# Altium PCB wled-tube.PcbDoc
Units mm, origin at the board's own origin, x right, y up, seen from the top; angles counter-clockwise.
Board outline 23 x 76.5 mm, 4 copper layers (Top Layer, GND, PWR, Bottom Layer), stack 1.582 mm thick; 64 components, 43 nets, 223 pads, 134 vias.
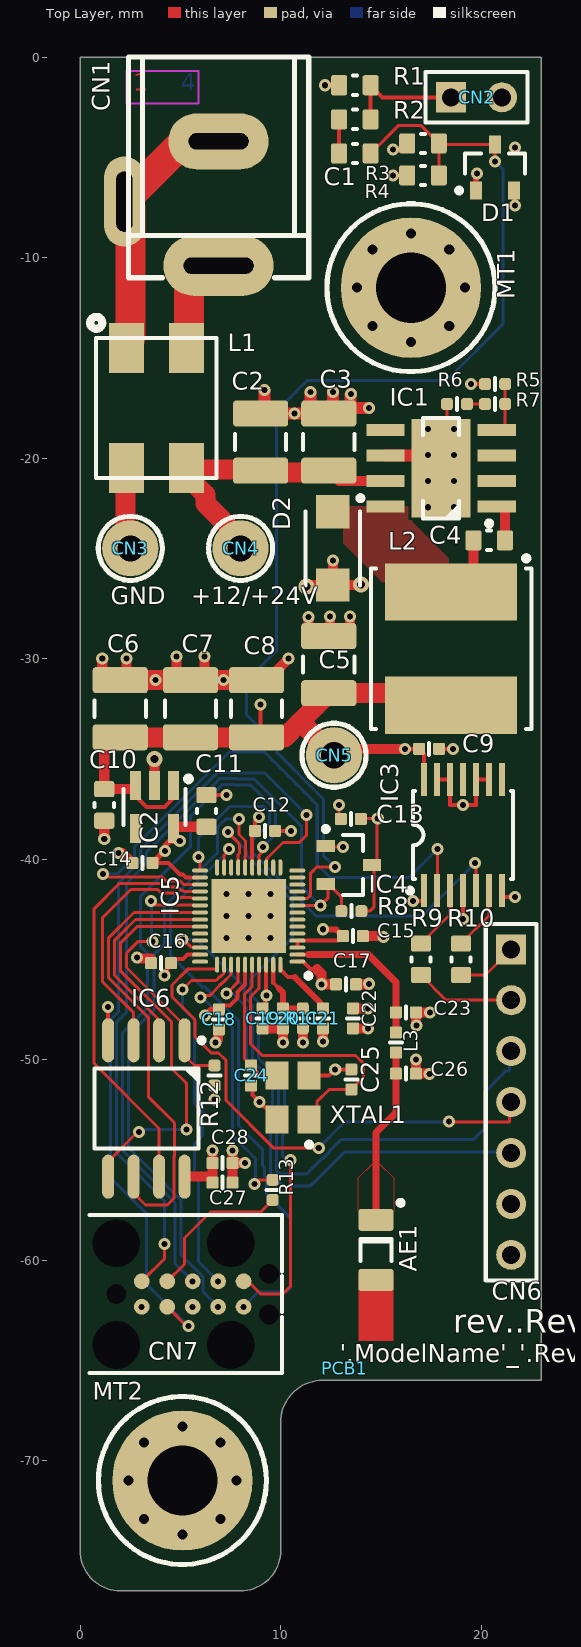
[diagram p0: Top Layer view]
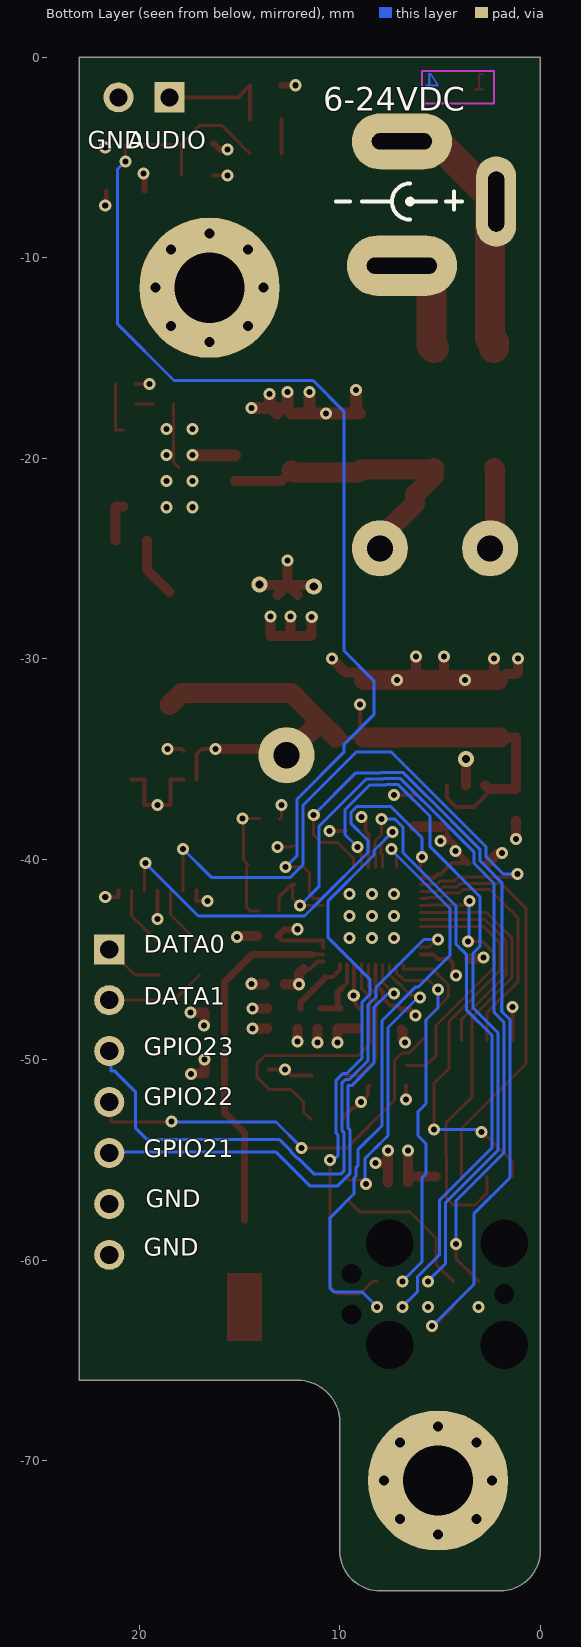
[diagram p1: Bottom Layer view, seen from below]
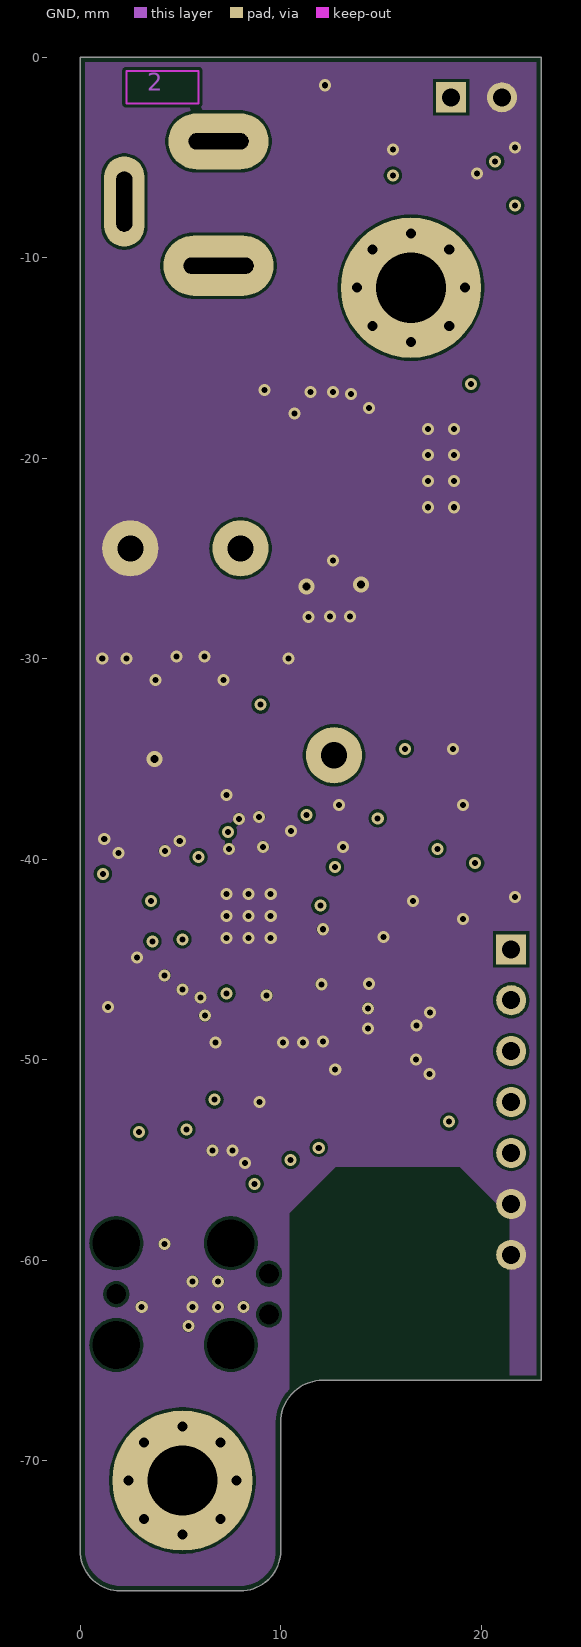
[diagram p2: GND]
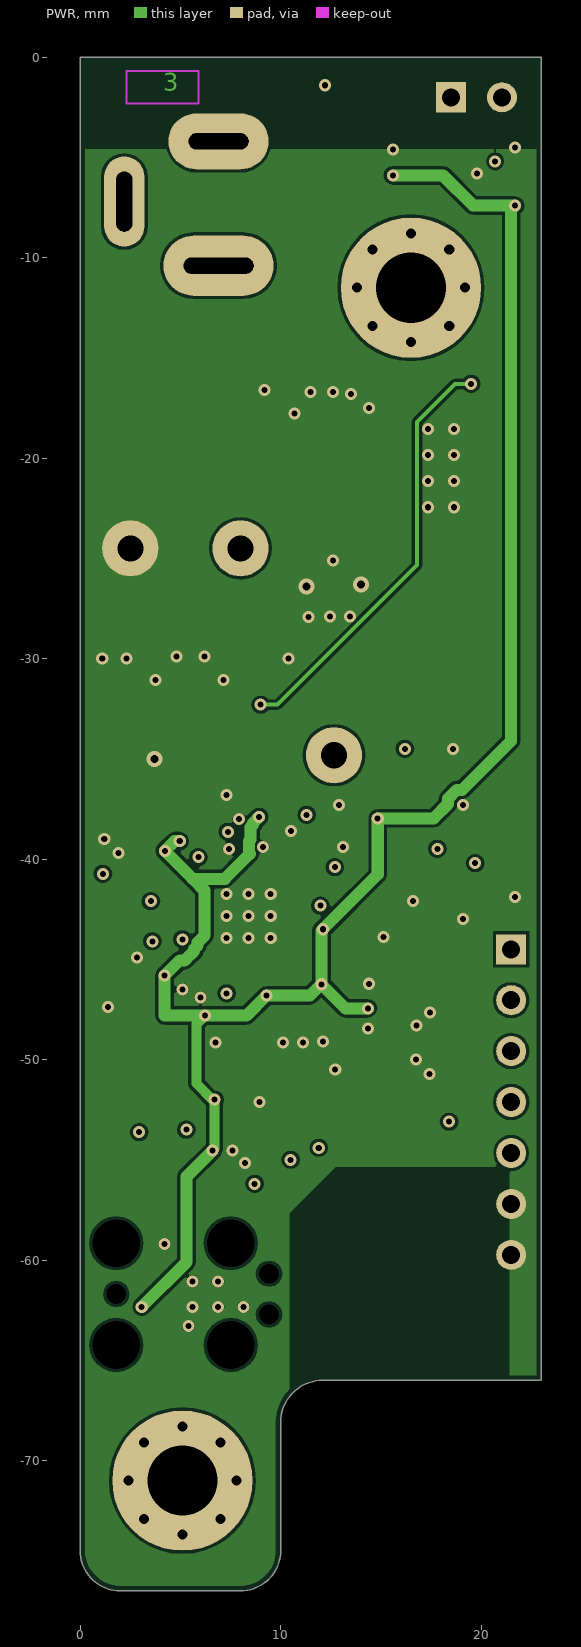
[diagram p3: PWR]
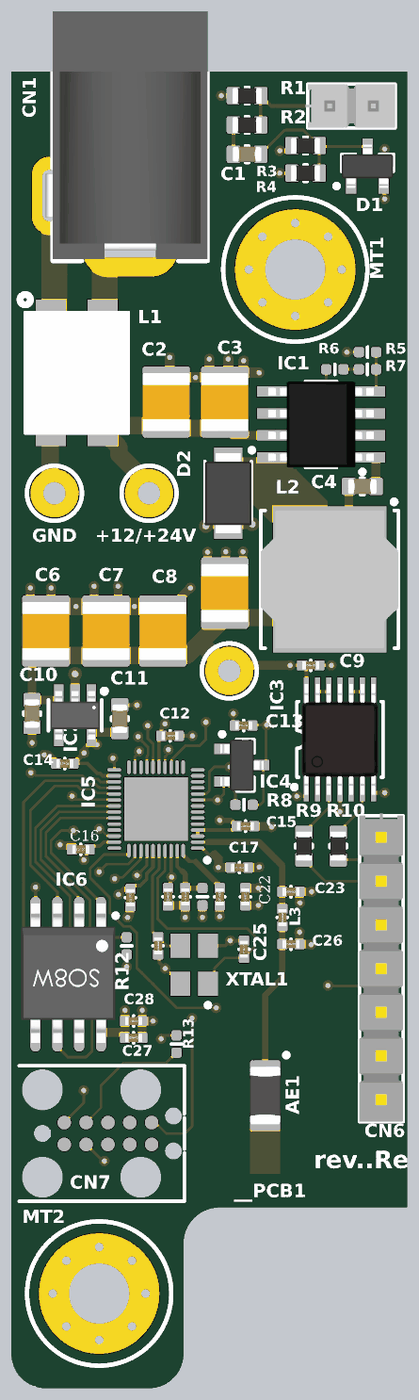
[diagram p4: 3D render of the assembled board from above, using the file's embedded part models]

## Layer stack, top to bottom
Top Solder: solder mask 0.0102, Solder Resist, Dk 3.5
Top Layer: signal copper 0.035
Dielectric1: prepreg 0.2104, 7628HR, Dk 4.6
GND: signal copper 0.0175
Dielectric2: core 1.065, NY3150, Dk 4.8
PWR: signal copper 0.0175
Dielectric3: prepreg 0.2014, 7628HR, Dk 4.6
Bottom Layer: signal copper 0.035
Bottom Solder: solder mask 0.0102, Solder Resist, Dk 3.5

## Board outline
10,-74.5 10,-68.1 cw(c12.1,-68.1) 12.1,-66 23,-66 23,0 0,0 0,-74.5 ccw(c2,-74.5) 2,-76.5 8,-76.5 ccw(c8,-74.5)

## Design rules (kind name [scope] priority, off if disabled: settings)
BoardOutlineClearance [All] p1: gap=0.254 ignorepadtopadclearanceinfootprint=FALSE except(0: Arc-SplitContinuation Track-SplitContinuation SMDPad-SplitContinuation THPad-SplitContinuation Via-SplitContinuation Fill-SplitContinuation Poly-SplitContinuation Region-SplitContinuation Text-SplitContinuation)
Clearance Clearance_50ohm [InNetClass('50ohm') vs InNet('GND')] p1: gap=0.3 ignorepadtopadclearanceinfootprint=TRUE except(0.15: Arc-SMDPad Track-SMDPad SMDPad-SMDPad; 1: Arc-Fill Arc-Poly Arc-Region Track-Fill Track-Poly Track-Region SMDPad-Fill SMDPad-Poly SMDPad-Region THPad-Fill THPad-Poly THPad-Region Via-Fill Via-Poly Via-Region Fill-Fill Fill-Poly Fill-Region Poly-Poly Poly-Region Region-Region)
Clearance [All] p2: gap=0.15 ignorepadtopadclearanceinfootprint=FALSE except(0.254: Arc-THPad Arc-Hole Track-THPad Track-Hole Via-Via; 0.5: THPad-THPad)
ComponentClearance ComponentClearance_SMA_RFIO [InComponent('RFIO')] p1: gap=0.1 collisioncheckmode=3 verticalgap=0.1 showdistances=FALSE
ComponentClearance [All] p2: gap=0.2 collisioncheckmode=3 verticalgap=0.3 showdistances=FALSE
HoleSize [All] p1: absolutevalues=TRUE maxlimit=3.6 minlimit=0.25 maxpercent=80.000 minpercent=20.000
HoleToHoleClearance [All] p1: gap=0.5 allowstackedmicrovias=TRUE
MinimumSolderMaskSliver [All] p1: minsoldermaskwidth=0.04
PlaneClearance [All] p1: clearance=0.2
PlaneConnect [All] p1: planeconnectstyle=Direct reliefexpansion=0.508 reliefentries=4 reliefconductorwidth=0.254 reliefairgap=0.254
PolygonConnect PolygonConnect_all [All] p1: connectstyle=Direct reliefconductorwidth=0.6 reliefentries=4 polygonreliefangle="90 Angle" airgapwidth=0.254
RoutingVias [All] p1: holewidth=0.3 width=0.6 viastyle="Through Hole" minholewidth=0.3 minwidth=0.6 maxholewidth=0.4 maxwidth=0.8
SilkToSilkClearance [All] p1: silktosilkclearance=0.05
SilkToSolderMaskClearance SilkscreenOverComponentPads [IsPad] p1: minsilkscreentomaskgap=0.05 clearancetoexposedcopper=TRUE
SolderMaskExpansion [All] p1: expansion=0.05 istentingtop=FALSE
Width Width_50ohm [InNetClass('50ohm')] p1: maxlimit=0.355 minlimit=0.254 preferedwidth=0.355 toplayer_minwidth=0.355 bottomlayer_minwidth=0.355 impedanceprofiledriven=TRUE minimp=50.000000 maximp=50.000000 favimp=50.000000
Width "Width All" [All] p2: maxlimit=2 minlimit=0.15 preferedwidth=0.2
22 further rules are at their usual default settings.

## Classes and differential pairs
net class QSPI: SD_CLK SD_CMD/C\S\ SD_D0/SDO SD_D1/SDI SD_D2/SHD SD_D3/SWP
net class 50ohm: NetAE1_1 NetC23_2

## Components (designator, comment, footprint, x,y, rotation, side; value= is the part's Value field where it differs from the comment)
AE1 "ANT3216LL00R2400A" 1206-ANT 14.755,-59.494 r270 top
C1 "1µ" 0603-CAP 13.7,-4.8 r180 top (schematic designator C42)
C2 "22µ" 1210-CAP 9,-19.2 r270 top
C3 "22µ" 1210-CAP 12.4,-19.2 r270 top
C4 "10n" 0603-CAP 20.4,-24.1 r180 top (schematic designator C1)
C5 "47µ" 1210-CAP 12.4,-30.3 r270 top
C6 "47µ" 1210-CAP 2,-32.5 r270 top (schematic designator C8)
C7 "47µ" 1210-CAP 5.5,-32.5 r270 top
C8 "47µ" 1210-CAP 8.8,-32.5 r270 top (schematic designator C6)
C9 "100n" 0402-CAP 17.4,-34.5 r180 top
C10 "1µ" 0603-CAP 1.2,-37.3 r90 top (schematic designator C41)
C11 "1µ" 0603-CAP 6.3,-37.6 r270 top (schematic designator C4)
C12 "100n" 0402-CAP 9.222,-38.594 r180 top (schematic designator C25)
C13 "100n" 0402-CAP 13.5,-38 r0 top (schematic designator C36)
C14 "100n" 0402-CAP 3.1,-40.2 r0 top (schematic designator C24)
C15 "100n" 0402-CAP 13.605,-43.844 r180 top (schematic designator C26)
C16 "100n" 0402-CAP 4.029,-45.194 r0 top (schematic designator C23)
C17 "100n" 0402-CAP 13.255,-46.244 r180 top (schematic designator C27)
C18 "100n" 0402-CAP 6.922,-47.994 r90 top (schematic designator C22)
C19 "100n" 0402-CAP 9.105,-47.944 r90 top (schematic designator C12)
C20 "3n3" 0402-CAP 10.105,-47.944 r90 top (schematic designator C33)
C21 "10n" 0402-CAP 12.105,-47.944 r270 top (schematic designator C40)
C22 "1µ" 0402-CAP 13.605,-47.944 r90 top (schematic designator C11)
C23 "?" 0402-CAP 16.25,-47.65 r180 top (schematic designator C35)
C24 "12p" 0402-CAP 8.522,-50.794 r90 top (schematic designator C32)
C25 "12p" 0402-CAP 13.522,-50.994 r270 top (schematic designator C31)
C26 "?" 0402-CAP 16.25,-50.7 r180 top (schematic designator C34)
C27 "100n" 0402-CAP 7.102,-56.141 r180 top (schematic designator C37)
C28 "1µ" 0402-CAP 7.102,-55.166 r180 top (schematic designator C38)
CN1 "" DCJACK-1 6.9,3.5 r270 top
CN2 "CON-HDR-MALE-2.54MM-1x2-VERT-THT" CON-HDR-MALE-2.54MM-1x2-VERT-THT 18.5,-2 r0 top (schematic designator CN6)
CN3 "PAD1.3MM" PAD1MM3 2.5,-24.5 r180 top (schematic designator CN4)
CN4 "PAD1.3MM" PAD1MM3 8,-24.5 r0 top (schematic designator CN2)
CN5 "PAD1.3MM" PAD1MM3 12.661,-34.821 r0 top (schematic designator CN3)
CN6 "CON-HDR-MALE-2.54MM-1x7-VERT-THT" CON-HDR-MALE-2.54MM-1x7-VERT-THT 21.5,-44.5 r270 top (schematic designator CN5)
CN7 "TC2050_RASE" TC2050 1.8,-61.7 r0 top (schematic designator CN8)
D1 "BAT54SLT1G" SOT-23 20.7,-5.5 r0 top
D2 "SS24FL" SMAF 12.6,-24.5 r270 top
IC1 "TPS5430" TPS5430 18,-20.5 r180 top
IC2 "TLV75533PDBVR" SOT-23-5 3.7,-37.4 r180 top (schematic designator IC8)
IC3 "SN74AHCT125PW" TSSOP14 19.1,-38.8 r0 top (schematic designator IC2)
IC4 "UM803RS" SOT-23 13.4,-40.3 r270 top
IC5 "ESP32-D0WD-V3" ESP32-D0WD-V3 8.405,-42.844 r180 top (schematic designator IC3)
IC6 "W25Q32JVSSIQ" SO-08L 3.302,-52.441 r270 top (schematic designator IC5)
L1 "300ohm" COILCMACM7060 3.8,-17.5 r270 top (schematic designator L3)
L2 "18µH" COILSRN8040 18.5,-29.5 r270 top (schematic designator L1)
L3 "0R" 0402-IND 15.75,-49.15 r90 top value=? (schematic designator L2)
MT1 "*" SCRW3MM 16.5,-11.5 r0 top
MT2 "*" SCRW3MM 5.1,-71 r0 top
PCB1 "wled-tube_1" PCB 13.2,-65.4 r0 top (schematic designator PCB)
R1 "100k" 0603-RES 13.7,-1.4 r0 top (schematic designator R8)
R2 "1k" 0603-RES 13.7,-3.1 r0 top (schematic designator R14)
R3 "100k" 0603-RES 17.1,-4.3 r0 top (schematic designator R10)
R4 "100k" 0603-RES 17.1,-5.9 r180 top (schematic designator R2)
R5 "10k" 0402-RES 20.7,-16.3 r180 top (schematic designator R1)
R6 "510R" 0402-RES 18.8,-17.3 r0 top (schematic designator R9)
R7 "2k7" 0402-RES 20.7,-17.3 r0 top (schematic designator R3)
R8 "10k" 0402-RES 13.525,-42.6 r180 top (schematic designator R7)
R9 "51R" 0603-RES 17,-45 r270 top (schematic designator R13)
R10 "51R" 0603-RES 19,-45 r270 top (schematic designator R12)
R11 "20k" 0402-RES 11.105,-47.944 r90 top (schematic designator R6)
R12 "10k" 0402-RES 6.7,-50.8 r270 top (schematic designator R11)
R13 "470R" 0402-RES 9.6,-56.5 r270 top (schematic designator R5)
XTAL1 "TSX-3225 40.0000MF10Y-K0" TSX-3225 10.622,-51.894 r90 top value=40MHz (schematic designator XTAL2)

## Footprints (in the part's own frame and the unit in brackets; to place one, negate y for a bottom-side part, rotate by r counter-clockwise, add the part's x,y. Pads: shape width x height; smd on the part's side, far side on the other; paste and mask are expansions set on the pad)
0402-CAP [mm] "Chip Capacitor, 2-Leads, Body 1,00x0,50mm, IPC Medium Density"
  rrect25% 0.6x0.6 smd: 1(-0.5,0) 2(0.5,0)
  silkscreen extent 0,-0.3 0,0.3, body extent -0.5,-0.25 0.5,0.25, height 0.5
0402-IND [mm] "Chip Capacitor, 2-Leads, Body 1,00x0,50mm, IPC Medium Density"
  rrect25% 0.6x0.6 smd: 1(-0.5,0) 2(0.5,0)
  silkscreen extent 0,-0.3 0,0.3, body extent -0.5,-0.25 0.5,0.25, height 0.5
0402-RES [mm] "Chip Resistor, 2-Leads, Body 1,00x0,50mm, IPC Medium Density"
  rrect50% 0.6x0.6 smd: 1(-0.5,0) 2(0.5,0)
  silkscreen extent 0,-0.3 0,0.3, body extent -0.55,-0.3 0.55,0.3, height 0.3
0603-CAP [mm] "Chip Capacitor, 2-Leads, Body 1.6x0.8mm, IPC Medium Density"
  rrect25% 0.8x1 smd: 1(-0.787,0) 2(0.787,0)
  silkscreen extent -0.1,-0.48 0.1,0.48, body extent -0.85,-0.45 0.85,0.45, height 0.9
0603-RES [mm] "Chip resistor, 2-Leads, Body 1.6x0.8mm, IPC Medium Density"
  rrect25% 0.8x1 smd: 1(-0.787,0) 2(0.787,0)
  silkscreen extent -0.1,-0.48 0.1,0.48, body extent -0.85,-0.45 0.85,0.45, height 0.55
1206-ANT [mm] "Chip Antenna, 2-Leads, Body 3,20x1,60mm, IPC Medium Density"
  rrect25% 1.1x1.75 smd: 1(-1.5,0) 2(1.5,0)
  silkscreen extent -2.45,-0.77 0.55,1.32, body extent -1.7,-0.9 1.7,0.9, height 1.8
1210-CAP [mm] "Chip Capacitor, 2-Leads, Body 3,20x2,50mm, IPC Medium Density"
  rrect25% 1.3x2.75 smd: 1(-1.425,0) 2(1.425,0)
  silkscreen extent -0.4,-1.27 0.4,1.28, body extent -1.7,-1.38 1.7,1.38, height 2
COILCMACM7060 [mm]
  rect 2.5x1.75 smd: 1(-3,-1.5) 2(-3,1.5) 3(3,1.5) 4(3,-1.5)
  silkscreen extent -4.55,-3.3 3.5,3, body extent -3.5,-3 3.5,3, height 3.5
COILSRN8040 [mm]
  rect 2.85x6.6 smd: 1(-2.825,0) 2(2.825,0)
  silkscreen extent -4.63,-4 4,4, body extent -4,-4 4,4, height 4.16
CON-HDR-MALE-2.54MM-1x2-VERT-THT [mm] "Connector; Header; 2 Position"
  rect 1.5x1.5 hole 0.9: 1(0,0)
  round 1.5 hole 0.9: 2(2.54,0)
  silkscreen extent -1.27,-1.27 3.81,1.27, body extent -1.4,-1.27 3.81,1.27, height 8.38
CON-HDR-MALE-2.54MM-1x7-VERT-THT [mm] "Connector; Header; 7 Position"
  rect 1.5x1.5 hole 0.9: 1(0,0)
  round 1.5 hole 0.9: 2(2.54,0) 3(5.08,0) 4(7.62,0) 5(10.16,0) 6(12.7,0) 7(15.24,0)
  silkscreen extent -1.27,-1.27 16.51,1.27, body extent -1.4,-1.27 16.51,1.27, height 8.38
DCJACK-1 [mm]
  oval 3x5.5 hole 0.8 slot 3.5 at 90 deg: 1(13.9,0)
  oval 4.5x2 hole 0.8 slot 3 at 0 deg: 2(10.7,-4.7)
  oval 2.8x5 hole 0.8 slot 3 at 90 deg: 3(7.7,0)
  silkscreen extent 3.5,-4.5 14.5,4.5, body extent 0,-4.9 14.4,4.5, height 11
ESP32-D0WD-V3 [mm] "QFN, 48-Leads, Body 5.00x5.00mm, Pitch 0.35mm, Thermal Pad 3.70x3.70mm, IPC Medium Density"
  oval 0.8x0.2 smd: 1(-2.425,2.275) 2(-2.425,1.925) 3(-2.425,1.575) 4(-2.425,1.225) 5(-2.425,0.875) 6(-2.425,0.525) 7(-2.425,0.175) 8(-2.425,-0.175) 9(-2.425,-0.525) 10(-2.425,-0.875) 11(-2.425,-1.225) 12(-2.425,-1.575) 13(-2.425,-1.925) 14(-2.425,-2.275) 25(2.425,-2.275) 26(2.425,-1.925) 27(2.425,-1.575) 28(2.425,-1.225) 29(2.425,-0.875) 30(2.425,-0.525) 31(2.425,-0.175) 32(2.425,0.175) 33(2.425,0.525) 34(2.425,0.875) 35(2.425,1.225) 36(2.425,1.575) 37(2.425,1.925) 38(2.425,2.275)
  oval 0.2x0.8 smd: 15(-1.575,-2.425) 16(-1.225,-2.425) 17(-0.875,-2.425) 18(-0.525,-2.425) 19(-0.175,-2.425) 20(0.175,-2.425) 21(0.525,-2.425) 22(0.875,-2.425) 23(1.225,-2.425) 24(1.575,-2.425) 39(1.575,2.425) 40(1.225,2.425) 41(0.875,2.425) 42(0.525,2.425) 43(0.175,2.425) 44(-0.175,2.425) 45(-0.525,2.425) 46(-0.875,2.425) 47(-1.225,2.425) 48(-1.575,2.425)
  rect 3.7x3.7 smd: 49(0,0)
  silkscreen extent -3.1,2.85 -2.85,3.1, body extent -2.52,-2.53 2.53,2.52, height 0.9
PAD1MM3 [mm]
  round 2.8 hole 1.3: 1(0,0)
  silkscreen extent -1.6,-1.6 1.6,1.6
PCB [mm]
SCRW3MM [mm] "3mm mounting hole"
  round 7 hole 3.5: 0(0,0)
  silkscreen extent -4.19,-4.19 4.19,4.19
SMAF [mm] "SODFL, 2-Leads, Body 2.55x4.65mm, IPC Medium Density"
  rect 1.65x1.65 smd: A(1.825,0) K(-1.825,0)
  silkscreen extent -2.62,-1.35 1.85,1.5, body extent -2.32,-1.35 2.32,1.35, height 1.1
SO-08L [mm] "SOIC, 8-Leads, Body 5.2x5.2mm, Pitch 1.27mm, IPC Medium Density"
  oval 2.2x0.6 smd: 1(-3.4,1.905) 2(-3.4,0.635) 3(-3.4,-0.635) 4(-3.4,-1.905) 5(3.4,-1.905) 6(3.4,-0.635) 7(3.4,0.635) 8(3.4,1.905)
  silkscreen extent -3.52,-2.6 2,2.88, body extent -4.1,-2.73 4,2.73, height 1.75
SOT-23 [mm]
  rect 0.6x0.9 smd: 1(-0.95,-1.15) 2(0.95,-1.15) 3(0,1.15)
  silkscreen extent -1.92,-1.27 1.5,0.7, body extent -1.5,-1.25 1.5,1.25, height 1.15
SOT-23-5 [mm]
  rect 0.55x1.45 smd: 1(-0.95,-1.075) 2(0,-1.075) 3(0.95,-1.075) 4(0.95,1.075) 5(-0.95,1.075)
  silkscreen extent -1.84,-1.54 1.55,0.9, body extent -1.45,-1.41 1.45,1.41, height 1.45
TC2050 [mil] "Tagconnect 10 pin TC2050-IDC-FP"
  round 31 smd: 1(50,-25) 2(100,-25) 3(150,-25) 4(200,-25) 5(250,-25) 6(250,25) 7(200,25) 8(150,25) 9(100,25) 10(50,25)
  round 3.94 hole 93.5 unplated: X(0,-100) X(0,100) X(225,-100) X(225,100)
  round 3.94 hole 39 unplated: X(0,0) X(300,-40) X(300,40)
  silkscreen extent -53,-155 325,155
TPS5430 [mm] "SOIC, 8-Leads, Body 4.9x3.9mm, Pitch 1.27mm, IPC Medium Density"
  rect 1.9x0.6 smd: 1(-2.78,1.905) 2(-2.78,0.635) 3(-2.78,-0.635) 4(-2.78,-1.905) 5(2.78,-1.905) 6(2.78,-0.635) 7(2.78,0.635) 8(2.78,1.905)
  rect 2.95x4.9 smd paste-2 mask+0.102: EP(0,0)
  silkscreen extent -2.53,-2.5 0.9,2.88, body extent -3.08,-2.5 3.08,2.5, height 2
TSSOP14 [mm] "Shrink Small Outline; 14 Leads; Body Width 4.4 mm; Pitch 0.65 mm"
  rect 0.3x1.65 smd: 1(-1.95,-2.775) 2(-1.3,-2.775) 3(-0.65,-2.775) 4(0,-2.775) 5(0.65,-2.775) 6(1.3,-2.775) 7(1.95,-2.775) 8(1.95,2.775) 9(1.3,2.775) 10(0.65,2.775) 11(0,2.775) 12(-0.65,2.775) 13(-1.3,2.775) 14(-1.95,2.775)
  silkscreen extent -2.77,-2.9 2.5,2.2, body extent -2.23,-3.21 2.22,3.22, height 1.11
TSX-3225 [mm]
  rect 1.4x1.15 smd: 1(-1.1,-0.8) 2(1.1,-0.8) 3(1.1,0.8) 4(-1.1,0.8)
  silkscreen extent -2.47,-0.93 -2.23,-0.68, body extent -1.6,-1.25 1.6,1.25, height 0.6

## Part data
AE1: "Ceramic chip antenna 2.4 GHz", Manufacturer=Yageo, Supplier Part Number 1=C293767, Datasheet=https://datasheet.lcsc.com/lcsc/1810241140_YAGEO-ANT3216LL00R2400A_C293767.pdf, Manufacturer Part Number=ANT3216LL00R2400A, Supplier 1=LCSC, UID=ANT3216LL00R2400A
C1 C10 C11: library part CAP0603-1µ-10V-10%-X7R, "CAP 0603 CERAMIC 1µ 10V ±10% X7R", Dielectric=X7R, Tolerance=10%, Voltage=10V, _P1=10V, _P2=X7R, Footprint path=0603-CAP.PcbLib, Library path=NONPCAP.SchLib, UID=CAP0603-1µ-10V-10%-X7R
C2 C3: library part CAP1210-22µ-35V-10%-X5R, "CAP 1210 CERAMIC 22µ 35V ±10% X5R", Dielectric=X5R, Tolerance=10%, Voltage=35V, _P1=35V, _P2=X5R, Footprint path=1210-CAP.PcbLib, Library path=NONPCAP.SchLib, UID=CAP1210-22µ-35V-10%-X5R
C4: library part CAP0603-10n-50V-10%-X7R, "CAP 0603 CERAMIC 10n 50V ±10% X7R", Dielectric=X7R, Tolerance=10%, Voltage=50V, _P1=50V, _P2=X7R, Footprint path=0603-CAP.PcbLib, Library path=NONPCAP.SchLib, UID=CAP0603-10n-50V-10%-X7R
C5 C6 C7 C8: library part CAP1210-47µ-10V-10%-X7R, "CAP 1210 CERAMIC 47µ 10V ±10% X7R", Dielectric=X7R, Tolerance=10%, Voltage=10V, _P1=10V, _P2=X7R, Footprint path=1210-CAP.PcbLib, Library path=NONPCAP.SchLib, UID=CAP1210-47µ-10V-10%-X7R
C9 C12 C13 C14 C15 C16 C17 C18 C19 C27: library part CAP0402-100n-16V-10%-X7R, "CAP 0402 CERAMIC 100n 16V ±10% X7R", Dielectric=X7R, Tolerance=10%, Voltage=16V, _P1=16V, _P2=X7R, Footprint path=0402-CAP.PcbLib, Library path=NONPCAP.SchLib, UID=CAP0402-100n-16V-10%-X7R
C20: library part C0402-3n3-50V-X7R-10%, "Cap SMT 0402 3n3 50V X7R ±10%", Dielectric=X7R, Supplier Part Number 1=C26404, Tolerance=10%, Voltage=50V, _P1=50V, _P2=X7R, Capacitance=3n3, Supplier 1=LCSC, UID=C0402-3n3-50V-X7R-10%
C21: library part C0402-10n-25V-X7R-10%, "Cap SMT 0402 10n 25V X7R ±10%", Dielectric=X7R, Tolerance=10%, Voltage=25V, _P1=25V, _P2=X7R, Capacitance=10n, UID=C0402-10n-25V-X7R-10%
C22 C28: library part CAP0402-1µ-6V3-10%-X5R, "CAP 0402 CERAMIC 1µ 6V3 ±10% X5R", Dielectric=X5R, Tolerance=10%, Voltage=6V3, _P1=6V3, _P2=X5R, Footprint path=0402-CAP.PcbLib, Library path=NONPCAP.SchLib, UID=CAP0402-1µ-6V3-10%-X5R
C23 C26: library part C0402-?-?-?-?%, "Cap SMT 0402 ? ? ? ±?%", Tolerance=?%, _P1=?, _P2=?, Capacitance=?, Dielectric=?, UID=C0402-?-?-?-?%, Voltage=?
C24 C25: library part C0402-12p-50V-C0G-5%, "Cap SMT 0402 12p 50V C0G ±5%", Dielectric=C0G, Tolerance=5%, Voltage=50V, _P1=50V, _P2=C0G, Capacitance=12p, UID=C0402-12p-50V-C0G-5%
CN1: library part DCJACK-1, "DC Jack Lih Sheng LD-0202A 2.0mm", Manufacturer="Lih Sheng", Manufacturer Part Number=LD-0202A-2.0, Pin Count=3, UID=DCJACK-1
CN2: "CONN HEADER VERT 2POS 2.54MM", Manufacturer="Samtec Inc.", Manufacturer Part Number=TSW-102-07-L-S, Material Flammability Rating="UL94 V-0", Operating Temperature="-55°C ~ 125°C", Supplier Part Number 1=SAM1031-02-ND, Connector Type=Header, Contact Finish - Mating=Gold, Contact Finish - Post=Tin, Contact Finish Thickness - Mating="10.0µin (0.25µm)", Contact Length - Mating="0.230\" (5.84mm)", Contact Length - Post="0.100\" (2.54mm)", Contact Type="Male Pin", Datasheets=http://suddendocs.samtec.com/prints/tsw-xxx-xx-x-x-xx-xxx-footprint.pdf, Insulation Height="0.100\" (2.54mm)", Mounting Type="Through Hole", Number of Positions=2, Number of Rows=1, Overall Contact Length="0.430\" (10.92mm)", Pitch="0.100\" (2.54mm)", Series=TSW, Supplier 1=Digi-Key, UID=CON-HDR-MALE-2.54MM-1x2-VERT-THT
CN6: "CONN HEADER VERT 7POS 2.54MM", Manufacturer="Samtec Inc.", Manufacturer Part Number=TSW-107-07-L-S, Material Flammability Rating="UL94 V-0", Operating Temperature="-55°C ~ 125°C", Supplier Part Number 1=SAM1031-07-ND, Connector Type=Header, Contact Finish - Mating=Gold, Contact Finish - Post=Tin, Contact Finish Thickness - Mating="10.0µin (0.25µm)", Contact Length - Mating="0.230\" (5.84mm)", Contact Length - Post="0.100\" (2.54mm)", Contact Type="Male Pin", Datasheets=http://suddendocs.samtec.com/catalog_english/tsw_th.pdf, Insulation Height="0.100\" (2.54mm)", Mounting Type="Through Hole", Number of Positions=7, Number of Rows=1, Overall Contact Length="0.430\" (10.92mm)", Pitch="0.100\" (2.54mm)", Series=TSW, Supplier 1=Digi-Key, UID=CON-HDR-MALE-2.54MM-1x7-VERT-THT
CN7: "Solderless programming connector, mates with Tag-Connect TC2050", Manufacturer Part Number=-, UID=TC2050_RASE
D1: "BAT54SLT1G Dual 30V 200mA Schottky Diode", Manufacturer="ON Semiconductor", Supplier Part Number 1=BAT54SLT1GOSTR-ND, Category=DIODE, Footprint path=SOT-23.PcbLib, Library path=BAT54SLT1G.SchLib, Manufacturer Part Number=BAT54SLT1G, Series=BAT54, Supplier 1=Digi-Key, UID=BAT54SLT1G
D2: "40V 550mV@2A 2A SMAF Schottky Barrier Diodes (SBD) ROHS", Manufacturer=Shikues, Supplier Part Number 1=C111630, Datasheet=https://datasheet.lcsc.com/lcsc/1809211222_Shikues-SS24FL_C111630.pdf, Manufacturer Part Number=SS24FL, Supplier 1=LCSC, UID=SS24FL
IC1: "Step-down type SO-8 DC-DC Converters ROHS", Manufacturer=TI, Manufacturer Part Number=TPS5430DDAR, Supplier Part Number 1=C9864, Datasheet=http://www.ti.com/cn/lit/gpn/tps5430, Supplier 1=LCSC, UID=TPS5430
IC2: Manufacturer=TI, Category=Regulator, Manufacturer Part Number=TLV75533PDBVR, UID=TLV75533PDBVR
IC3: "Quad buffer, TSSOP14", Manufacturer="Texas Instruments", Manufacturer Part Number=SN74AHCT125PWR, UID=SN74AHCT125PW
IC4: "MICROPROCESSOR RESET CIRCUIT 2.63V SOT23", Category="IC SUPERVISOR", UID=UM803RS
IC5: "IC RF TxRx + MCU Bluetooth, WiFi 802.11b/g/n, Bluetooth 4.2 2.412GHz ~ 2.484GHz 48-VFQFN Exposed Pad", Manufacturer=Espressif, Supplier Part Number 1=1904-ESP32-D0WD-V3CT-ND, Datasheet=http://espressif.com/sites/default/files/documentation/esp32_datasheet_en.pdf, Manufacturer Part Number=ESP32-D0WD-V3, Supplier 1=Digi-Key, UID=ESP32-D0WD-V3
IC6: "3V 32M-BIT SERIAL FLASH MEMORY WITH DUAL/QUAD SPI, QPI & DTR", Manufacturer=Winbond, Manufacturer Part Number=W25Q32JVSSIQ, UID=W25Q32JVSSIQ
L1: library part COILCM7060-301, "TDK ACM7060 / Sunltech Tech SMW7060 / Shun Xiang Nuo Elec SMCM7060", Manufacturer="TDK, Sunltech, Shun Xiang Nuo Elec", Manufacturer Part Number="ACM7060-301-2PL-TL01, SMW7060S301NTT, SMCM7060-301T", Category="CMC SMT", UID=COILCM7060-301
L2: library part SMNR8040-180MT, "18uH, 68mOhm(max), 2.7A(sat), 2.4A(DC)", Current Rating="2.7A(sat), 2.4A(DC)", DC Resistance=68mOhm, Manufacturer=SXN, Supplier Part Number 1=C467157, Category="INDUCTOR SMT", Manufacturer Part Number=SMNR8040-180MT, Supplier 1=LCSC, UID=SMNR8040-180MT
L3: library part L0402-?-?%, "Inductor SMT ? ±?%", Tolerance=?%, Composition=Wirewound, UID=L0402-?-?%
MT1 MT2: library part SCRW-3MMISO, Pin Count=1, UID=SCRW-3MMISO
PCB1: library part PCB, "See PCB gerber files for specifications.", UID=PCB
R1 R3 R4: library part RES-0603-100k-100mW-1%-THICKFILM, "RES SMD 100K OHM 1% 1/10W 0603", Manufacturer=Yageo, Manufacturer Part Number=RC0603FR-07100KL, Operating Temperature="-55°C ~ 155°C", Package / Case="0603 (1608 Metric)", Power=100mW, Supplier Part Number 1=311-100KHRCT-ND, Temperature Coefficient=±100ppm/°C, Tolerance=1%, _P1=100mW, _P2=1%, _P3="Thick Film", Composition="Thick Film", Datasheets=http://www.yageo.com/NewPortal/yageodocoutput?fileName=/pdf/R-Chip/PYu-RC_Group_51_RoHS_L_4.pdf, Dimensions="0.063\" L x 0.031\" W (1.60mm x 0.80mm)", Features="Moisture Resistant", Height="0.022\" (0.55mm)", Series=RC, Supplier 1=Digi-Key, UID=RES-0603-100k-100mW-1%-THICKFILM
R2: library part RES-0603-1k-100mW-1%-THICKFILM, "RES SMD 1K OHM 1% 1/10W 0603", Manufacturer=Yageo, Manufacturer Part Number=RC0603FR-071KL, Operating Temperature="-55°C ~ 155°C", Package / Case="0603 (1608 Metric)", Power=100mW, Supplier Part Number 1=311-1.00KHRCT-ND, Temperature Coefficient=±100ppm/°C, Tolerance=1%, _P1=100mW, _P2=1%, _P3="Thick Film", Composition="Thick Film", Datasheets=http://www.yageo.com/NewPortal/yageodocoutput?fileName=/pdf/R-Chip/PYu-RC_Group_51_RoHS_L_4.pdf, Dimensions="0.063\" L x 0.031\" W (1.60mm x 0.80mm)", Features="Moisture Resistant", Height="0.022\" (0.55mm)", Series=RC, Supplier 1=Digi-Key, UID=RES-0603-1k-100mW-1%-THICKFILM
R5 R8 R12: library part RES-0402-10k-63mW-1%-THICKFILM, "RES SMD 10K OHM 1% 1/16W 0402", Manufacturer=Yageo, Manufacturer Part Number=RC0402FR-0710KL, Operating Temperature="-55°C ~ 155°C", Package / Case="0402 (1005 Metric)", Power=63mW, Supplier Part Number 1=311-10.0KLRCT-ND, Temperature Coefficient=±100ppm/°C, Tolerance=1%, _P1=63mW, _P2=1%, _P3="Thick Film", Composition="Thick Film", Datasheets=https://www.yageo.com/upload/media/product/productsearch/datasheet/rchip/PYu-RC_Group_51_RoHS_L_11.pdf, Features="Moisture Resistant", Height - Seated (Max)="0.016\" (0.40mm)", Series=RC_L, Size / Dimension="0.039\" L x 0.020\" W (1.00mm x 0.50mm)", Supplier 1=Digi-Key, UID=RES-0402-10k-63mW-1%-THICKFILM
R6: library part RES-0402-510R-63mW-1%-THICKFILM, "RES SMD 510 OHM 1% 1/16W 0402", Manufacturer=Yageo, Manufacturer Part Number=RC0402FR-07510RL, Operating Temperature="-55°C ~ 155°C", Package / Case="0402 (1005 Metric)", Power=63mW, Supplier Part Number 1=311-510LRCT-ND, Temperature Coefficient=±100ppm/°C, Tolerance=1%, _P1=63mW, _P2=1%, _P3="Thick Film", Composition="Thick Film", Datasheets=https://www.yageo.com/upload/media/product/productsearch/datasheet/rchip/PYu-RC_Group_51_RoHS_L_11.pdf, Features="Moisture Resistant", Height - Seated (Max)="0.016\" (0.40mm)", Series=RC_L, Size / Dimension="0.039\" L x 0.020\" W (1.00mm x 0.50mm)", Supplier 1=Digi-Key, UID=RES-0402-510R-63mW-1%-THICKFILM
R7: library part RES-0402-2k7-63mW-1%-THICKFILM, "RES SMD 2.7K OHM 1% 1/16W 0402", Manufacturer=Yageo, Manufacturer Part Number=RC0402FR-072K7L, Operating Temperature="-55°C ~ 155°C", Package / Case="0402 (1005 Metric)", Power=63mW, Supplier Part Number 1=311-2.70KLRCT-ND, Temperature Coefficient=±100ppm/°C, Tolerance=1%, _P1=63mW, _P2=1%, _P3="Thick Film", Composition="Thick Film", Datasheets=https://www.yageo.com/upload/media/product/productsearch/datasheet/rchip/PYu-RC_Group_51_RoHS_L_11.pdf, Features="Moisture Resistant", Height - Seated (Max)="0.016\" (0.40mm)", Series=RC_L, Size / Dimension="0.039\" L x 0.020\" W (1.00mm x 0.50mm)", Supplier 1=Digi-Key, UID=RES-0402-2k7-63mW-1%-THICKFILM
R9 R10: library part RES-0603-51R-100mW-1%-THICKFILM, "RES SMD 51 OHM 1% 1/10W 0603", Manufacturer=Yageo, Manufacturer Part Number=RC0603FR-0751RL, Operating Temperature="-55°C ~ 155°C", Package / Case="0603 (1608 Metric)", Power=100mW, Supplier Part Number 1=311-51.0HRCT-ND, Temperature Coefficient=±100ppm/°C, Tolerance=1%, _P1=100mW, _P2=1%, _P3="Thick Film", Composition="Thick Film", Datasheets=http://www.yageo.com/NewPortal/yageodocoutput?fileName=/pdf/R-Chip/PYu-RC_Group_51_RoHS_L_4.pdf, Dimensions="0.063\" L x 0.031\" W (1.60mm x 0.80mm)", Features="Moisture Resistant", Height="0.022\" (0.55mm)", Series=RC, Supplier 1=Digi-Key, UID=RES-0603-51R-100mW-1%-THICKFILM
R11: library part RES-0402-20k-63mW-1%-THICKFILM, "RES SMD 20K OHM 1% 1/16W 0402", Manufacturer=Yageo, Manufacturer Part Number=RC0402FR-0720KL, Operating Temperature="-55°C ~ 155°C", Package / Case="0402 (1005 Metric)", Power=63mW, Supplier Part Number 1=311-20.0KLRCT-ND, Temperature Coefficient=±100ppm/°C, Tolerance=1%, _P1=63mW, _P2=1%, _P3="Thick Film", Composition="Thick Film", Datasheets=https://www.yageo.com/upload/media/product/productsearch/datasheet/rchip/PYu-RC_Group_51_RoHS_L_11.pdf, Features="Moisture Resistant", Height - Seated (Max)="0.016\" (0.40mm)", Series=RC_L, Size / Dimension="0.039\" L x 0.020\" W (1.00mm x 0.50mm)", Supplier 1=Digi-Key, UID=RES-0402-20k-63mW-1%-THICKFILM
R13: library part RES-0402-470R-63mW-1%-THICKFILM, "RES SMD 470 OHM 1% 1/16W 0402", Manufacturer=Yageo, Manufacturer Part Number=RC0402FR-07470RL, Operating Temperature="-55°C ~ 155°C", Package / Case="0402 (1005 Metric)", Power=63mW, Supplier Part Number 1=311-470LRCT-ND, Temperature Coefficient=±100ppm/°C, Tolerance=1%, _P1=63mW, _P2=1%, _P3="Thick Film", Composition="Thick Film", Datasheets=https://www.yageo.com/upload/media/product/productsearch/datasheet/rchip/PYu-RC_Group_51_RoHS_L_11.pdf, Features="Moisture Resistant", Height - Seated (Max)="0.016\" (0.40mm)", Series=RC_L, Size / Dimension="0.039\" L x 0.020\" W (1.00mm x 0.50mm)", Supplier 1=Digi-Key, UID=RES-0402-470R-63mW-1%-THICKFILM
XTAL1: "CRYSTAL 40.0000MHZ 10PF SMD", ESR (Equivalent Series Resistance)="40 Ohms", Frequency=40MHz, Frequency Stability=±10ppm, Load Capacitance=10pF, Manufacturer=EPSON, Operating Mode=Fundamental, Operating Temperature="-30°C ~ 85°C", Package / Case="4-SMD, No Lead", Ratings=-, Supplier Part Number 1=TSX-322540.0000MF10Y-K0-ND, Datasheet=https://support.epson.biz/td/api/doc_check.php?dl=brief_TSX-3225&lang=en, Frequency Tolerance=±10ppm, Height - Seated (Max)="0.024\"\" (0.60mm)", Manufacturer Part Number="TSX-3225 40.0000MF10Y-K0", Mounting Type="Surface Mount", Series=TSX-3225, Size / Dimension="0.126\"\" L x 0.098\"\" W (3.20mm x 2.50mm)", Supplier 1=Digi-Key, Type="MHz Crystal", UID="TSX-3225 40.0000MF10Y-K0"
CN3 CN4 CN5: Supplier 1=Digi-Key, UID=PAD1.3MM

## Via types
v1: diameter 0.6, hole 0.3, Top Layer to Bottom Layer, tented both sides, 115 vias
v2: diameter 0.5, hole 0.5, Top Layer to Bottom Layer, tented both sides, 16 vias
v3: diameter 0.8, hole 0.4, Top Layer to Bottom Layer, tented both sides, 3 vias

## Nets (pads, with @x,y where several pads share a name; then routed paths per layer and width w, separated by ;. In a path a pad name is that pad's centre, name@x,y a point inside that pad or via, vN(x,y) a via of type N, cw(c..) or ccw(c..) an arc to the next point about the centre after c; other vN are vias at no path point)
+3V3: C11.2 C12.2 C13.2 C14.2 C15.2 C16.2 C17.2 C18.2 C19.2 C22.2 C27.2 C28.2 CN7.1 D1.2 IC2.5 IC4.3 IC5.1 IC5.3 IC5.4 IC5.19 IC5.26 IC5.37 IC5.43 IC5.46 IC6.8 R4.2 R8.1 R12.2 | length 132.4
  Top Layer w0.15: C13.2 14.036,-37.964 v1(14.842,-37.964) 14.8,-38.006 14.8,-40.05 IC4.3 14.575,-40.3 14.65,-40.375 14.65,-42.4 14.45,-42.6 R8.1
  Top Layer w0.2: C14.2 4.4,-40.2 4.975,-40.775 5.135,-40.775 5.279,-40.919 IC5.26 ; v1(4.215,-45.803) 4.215,-45.695 4.355,-45.555 4.355,-45.194 4.555,-44.994 5.129,-44.994 5.355,-44.769 IC5.37 ; IC2.5@4.65,-38.925 IC2.5 ; v1(6.7,-52) R12.2 ; C18.2 7.122,-47.294 7.484,-47.294 7.857,-46.921 7.857,-46.621 8.23,-46.248 IC5.43 ; IC5.19 8.58,-39.629 8.572,-39.622 8.572,-38.744 C12.2 8.722,-38.094 v1(8.922,-37.894) ; C19.2@8.955,-47.444 9.028,-47.444 9.228,-47.244 9.228,-46.876 v1(9.305,-46.799) 9.28,-46.774 IC5.46 ; IC5.1 11.105,-45.119 11.48,-45.494 11.805,-45.494 ; IC5.3 IC5.4 12.88,-44.069 C15.2 ; v1(15.6,-5.9) R4.2 ; D1.2 21.65,-7.35 v1(21.7,-7.4)
  Top Layer w0.3: C14.2 4.207,-39.593 v1(4.223,-39.593) 4.28,-39.535 4.28,-39.295 IC2.5@4.65,-38.925 ; IC2.5@4.65,-38.387 4.95,-38.387 ; v1(6.222,-47.812) 6.54,-47.494 C18.2 ; v1(12.105,-43.5) 12.122,-43.517 12.778,-43.517 C15.2
  Top Layer w0.5: IC2.5@4.65,-39 4.839,-39 4.939,-39.1 v1(4.966,-39.1) ; 4.95,-38.387 C11.2 ; IC6.8 5.226,-55.822 6.602,-55.822 ; C27.2 6.602,-55.822 ; v1(6.602,-54.541) C28.2 6.602,-55.822 ; 11.805,-45.494 12.03,-45.719 v1(12.03,-46.244) C17.2 ; C22.2 v1(14.355,-47.444)
  PWR w0.5: v1(6.222,-47.812) 6.069,-47.965 5.8,-48.234 5.8,-51.2 v1@6.602,-52.002 ; v1(6.602,-54.541) 6.7,-54.442 v1(6.7,-52)
  PWR w0.6: v1(3.07,-62.335) 5.3,-60.105 5.3,-55.842 v1(6.602,-54.541) ; v1(4.966,-39.1) 4.716,-39.1 v1(4.223,-39.593) 5.615,-40.985 ; v1(8.922,-37.894) 8.626,-38.19 8.626,-38.286 8.5,-38.412 8.5,-39.021 8.418,-39.103 8.418,-39.686 8.466,-39.734 7.215,-40.985 5.615,-40.985 ; v1(14.355,-47.444) 13.23,-47.444 v1(12.03,-46.244) ; v1(15.6,-5.9) 18.1,-5.9 19.6,-7.4 v1(21.7,-7.4) 21.5,-7.6 21.5,-34.1 19.05,-36.55 18.789,-36.55 18.35,-36.989 18.35,-37.25 17.636,-37.964 v1(14.842,-37.964) 14.842,-40.763 v1(12.105,-43.5) 12.03,-43.575 v1(12.03,-46.244) ; 5.615,-40.985 6.2,-41.57 6.2,-43.818 5.85,-44.168 5.85,-44.311 5.683,-44.477 5.683,-44.586 5.271,-44.998 5.263,-44.998 5.211,-45.05 4.968,-45.05 v1(4.215,-45.803) 4.215,-47.812 v1(6.222,-47.812) 8.293,-47.812 v1(9.305,-46.799) 11.474,-46.799 v1(12.03,-46.244)
+5V: C5.2 C6.2 C7.2 C8.2 C9.2 C10.2 CN5.1 IC2.1 IC2.3 IC3.14 L2.2 R5.2 | length 58.5
  Top Layer w0.2: IC2.3@2.562,-36.513 2.562,-36.662 3.3,-37.4 4.2,-37.4 4.65,-36.95 IC2.1 ; v1(9,-32.3) 9,-34.028 8.951,-34.076 C8.2 10.2,-33.925 ; C5.2@11.762,-32.362 C5.2@11.814,-32.362 ; v1(16.2,-34.5) C9.2 17.15,-34.75 IC3.14 ; v1(19.5,-16.3) R5.2
  Top Layer w0.5: C6.2 1.2,-33.925 C10.2 2.562,-36.513 IC2.3 ; CN5.1 12.982,-34.5 v1(16.2,-34.5)
  Top Layer w1: C6.2 C7.2 C8.2 ; 10.2,-33.925 10.912,-33.212 ; CN5.1 11.053,-33.212 10.912,-33.212 ; L2.2 17.9,-31.725 C5.2 11.762,-32.362 10.912,-33.212
  PWR w0.2: v1(9,-32.3) 9.839,-32.3 13.689,-28.45 14.011,-28.128 16.8,-25.339 16.8,-18.2 18.7,-16.3 v1(19.5,-16.3)
ADC: C1.1 D1.3 IC5.10 R3.2 R4.1 | length 59.4
  Top Layer w0.15: IC5.10 11.331,-41.969 11.5,-41.8 11.5,-40.7 11.8,-40.4 v1(12.7,-40.4) ; C1.1 15.887,-3.4 16.987,-3.4 R3.2 ; R4.1 R3.2 ; v1(20.7,-5.2) D1.3 17.937,-4.35 R3.2
  Bottom Layer w0.15: v1(12.7,-40.4) 12.125,-39.825 12.125,-37.001 9.8,-34.676 9.8,-34.3 8.3,-32.8 8.3,-31.1 9.8,-29.6 9.8,-17.658 11.329,-16.129 18.271,-16.129 21.1,-13.3 21.1,-5.6 v1(20.7,-5.2)
DATA0: IC3.5 IC5.25 | length 23.2
  Top Layer w0.15: v1(5.9,-39.9) 5.98,-39.98 IC5.25 ; v1(19.7,-40.2) 19.75,-40.25 IC3.5
  Bottom Layer w0.15: v1(5.9,-39.9) 5.9,-38.941 7.472,-37.369 9.14,-37.369 9.447,-37.677 9.447,-38.219 8.597,-39.069 8.597,-39.67 10.9,-41.972 10.9,-41.981 11.763,-42.844 17.056,-42.844 v1(19.7,-40.2)
DATA1: IC3.2 IC5.27 | length 31.6
  Top Layer w0.15: v1(1.129,-40.737) 1.163,-40.737 1.2,-40.7 1.4,-40.9 4.1,-40.9 4.3,-41.1 5,-41.1 5.169,-41.269 IC5.27 ; IC3.2 17.82,-41.555 v1(17.82,-39.493)
  Bottom Layer w0.15: v1(1.129,-40.737) 1.863,-40.737 2.7,-39.9 2.7,-39.397 7.449,-34.648 9.169,-34.648 11.825,-37.304 11.825,-40.267 12.483,-40.925 16.388,-40.925 v1(17.82,-39.493)
DO0: CN6.1 R10.2 | length 3
  Top Layer w0.15: R10.2 20.213,-45.787 CN6.1
DO1: CN6.2 R9.2 | length 5
  Top Layer w0.15: R9.2 18.253,-47.04 CN6.2
GND: C2.1 C3.1 C5.1 C6.1 C7.1 C8.1 C9.1 C10.1 C11.1 C12.1 C13.1 C14.1 C15.1 C16.1 C17.1 C18.1 C19.1 C20.1 C21.2 C22.1 C23.1 C24.1 C25.1 C26.1 C27.1 C28.1 CN2.2 CN3.1 CN6.6 CN6.7 CN7.3 D1.1 D2.A IC1.6 IC1.EP IC2.2 IC3.1 IC3.4 IC3.7 IC3.9 IC3.10 IC3.12 IC3.13 IC4.1 IC5.49 IC6.4 L1.4 R1.1 R3.1 R6.1 R11.1 XTAL1.2 XTAL1.4 | length 80.1
  Top Layer w0.15: IC4.1 12.4,-39.35 12.45,-39.4 v1@13.307,-39.4 ; v1(12.9,-37.3) 12.9,-37.9 C13.1 ; IC1.EP 18.3,-20.2 R6.1
  Top Layer w0.2: IC6.4 v1(1.397,-47.388) ; C11.1 v1(7.3,-36.813) ; C24.1 8.605,-51.377 8.605,-51.777 v1(8.937,-52.109) 9.222,-52.394 9.347,-52.394 9.822,-52.869 XTAL1.4 ; C12.1 v1(10.522,-38.594) ; XTAL1.2 12.405,-50.794 12.705,-50.494 v1(12.722,-50.494) C25.1 ; v1(16.6,-42.1) 17.15,-42.1 IC3.1 ; IC3.13 IC3.12 18.45,-37.3 v1(19.1,-37.3) 19.75,-37.3 IC3.10 IC3.9 ; C9.1@17.8,-34.6 C9.1 v1(18.6,-34.5) ; v1(19.1,-43) IC3.4 ; IC3.7 21.05,-41.9 v1(21.7,-41.9)
  Top Layer w0.3: v1(12.2,-1.4) R1.1 ; v1(15.6,-4.6) 16,-4.6 16.3,-4.3 R3.1 ; D1.1 19.75,-5.85 v1(19.8,-5.8)
  Top Layer w0.5: v1(1.1,-30) 1.1,-30.675 1.182,-30.757 1.682,-30.757 C6.1 2.3,-30.775 v1(2.3,-30) ; v1(1.2,-39) C10.1 ; v1(1.9,-39.7) 2.1,-39.7 C14.1 ; v1@2.83,-44.892 2.882,-44.944 2.926,-44.944 2.951,-44.969 3.53,-44.969 C16.1@3.555,-44.994 ; IC2.2 v3(3.7,-35) ; v1(4.8,-29.9) 4.8,-30.925 C7.1@4.95,-31.075 ; C7.1@5.8,-31.075 6.2,-30.675 v1(6.2,-29.9) ; v1(6.755,-49.144) 6.755,-49.117 6.872,-49 6.872,-48.544 C18.1 ; v1(7.602,-54.541) C28.1 ; C27.1@7.614,-56.128 C27.1 C28.1 ; v1(8.227,-55.166) C28.1 ; C8.1 9.175,-30.7 9.7,-30.7 v1(10.4,-30) ; C19.1 C20.1 v1(10.105,-49.144) ; v1(11.105,-49.144) R11.1 ; v3(11.3,-26.4) 11.375,-26.325 D2.A ; v1(11.4,-27.92) 11.4,-28.814 11.461,-28.875 C5.1 ; D2.A@12.1,-26.825 D2.A ; v1(12.105,-49.094) C21.2 ; v1(12.461,-27.901) 12.461,-28.531 12.461,-28.814 C5.1 ; v1(12.6,-25.1) D2.A ; D2.A@13.1,-26.825 D2.A ; v1(13.461,-27.9) 13.461,-28.875 C5.1 ; C22.1 v1(14.355,-48.444) ; C17.1 14.38,-46.244 v1(14.405,-46.219) ; v3(14,-26.3) 13.975,-26.325 D2.A ; C15.1 15.072,-43.844 v1(15.122,-43.894) ; v1(16.75,-50) C26.1 17.4,-50.7 v1(17.425,-50.725) ; v1(16.775,-48.3) 16.75,-48.275 C23.1 v1(17.45,-47.65)
  Top Layer w0.6: v1(9.2,-16.6) 9.2,-17.575 C2.1 v1(10.7,-17.775) C3.1 12.675,-17.5 C3.1@13.128,-17.5 ; C3.1@11.5,-17.75 v1(11.5,-16.7) ; C3.1@12.6,-17.244 v1(12.6,-16.7) ; C3.1@13.128,-17.772 13.475,-17.425 13.475,-16.825 v1(13.5,-16.8) ; C3.1@13.475,-17.5 v1(14.4,-17.5) ; IC1.6 17.335,-19.865 v1(17.35,-19.85)
  Top Layer w1: C6.1@2.1,-31.075 v1(3.751,-31.075) 4.95,-31.075 C7.1 5.8,-31.075 v1(7.15,-31.075) C8.1 ; L1.4 2.25,-20.55 2.25,-20.75 2.25,-24.25 CN3.1
  other v1: 5.61,-62.335 2.83,-44.919 7.305,-43.944 8.405,-43.944 9.505,-43.944 7.305,-42.844 8.405,-42.844 9.505,-42.844 7.305,-41.744 8.405,-41.744 9.505,-41.744 13.1,-39.4 17.35,-22.45 18.65,-22.45 17.35,-21.15 18.65,-21.15 18.65,-19.85 17.35,-18.55 18.65,-18.55 21.7,-4.5
GPIO0: CN7.5 IC5.23 | length 29.4
  Top Layer w0.15: IC5.23 7.18,-39.794 7.422,-39.552 v1(7.422,-39.494)
  Bottom Layer w0.15: v1(7.422,-39.494) 7.422,-39.544 4.5,-42.467 4.5,-44.8 6.075,-46.375 6.217,-46.375 7.9,-48.058 7.9,-53.3 9.1,-54.5 9.1,-55.3 9.2,-55.4 9.2,-55.824 9.3,-55.924 9.3,-56.711 10.5,-57.911 10.5,-61.4 10.3,-61.6 8.885,-61.6 v1(8.15,-62.335)
GPIO21: CN6.5 IC5.42 | length 24.9
  Top Layer w0.15: v1(7.3,-46.7) 7.88,-46.12 IC5.42
  Bottom Layer w0.15: v1(7.3,-46.7) 7.6,-46.7 8.3,-47.4 8.3,-50.2 9.4,-51.3 9.6,-51.3 9.6,-53.4 9.5,-53.5 9.5,-55.7 10.1,-56.3 11.5,-56.3 13.2,-54.6 21.44,-54.6 CN6.5
GPIO22: CN6.4 IC5.39 | length 26.6
  Top Layer w0.15: IC5.39 6.83,-45.471 6.807,-45.494 5.363,-45.494 4.575,-46.283 4.575,-46.867 5.697,-47.989 5.697,-48.029 5.732,-48.063 5.732,-48.863 6.538,-49.669 6.899,-49.669 7.28,-50.05 7.28,-52.045 9.635,-54.4 v1(11.9,-54.4) ; v1(18.4,-53.1) 18.42,-53.12 21.412,-53.12 21.412,-52.208 CN6.4
  Bottom Layer w0.15: v1(11.9,-54.4) 13.18,-53.12 18.38,-53.12 v1(18.4,-53.1)
GPIO23: CN6.3 IC5.36 | length 31.1
  Top Layer w0.15: v1(5.1,-44) 5.151,-44 5.545,-44.394 5.955,-44.394 IC5.36
  Bottom Layer w0.15: v1(5.1,-44) 5.8,-44 8.2,-46.4 8.2,-46.876 8.6,-47.276 8.6,-50.076 9.524,-51 9.724,-51 9.9,-51.176 9.9,-53.524 9.8,-53.624 9.8,-55.167 9.8,-55.576 9.924,-55.7 11.3,-55.7 12.075,-54.925 12.117,-54.925 12.425,-54.617 12.425,-54.575 13,-54 19.6,-54 20.2,-53.4 20.2,-51.6 21.22,-50.58 21.412,-50.58 21.412,-49.668 CN6.3
NetAE1_1: AE1.1 C26.2 L3.1 | length 8.8
  Top Layer w0.355: AE1.1 14.755,-53.645 15.75,-52.65 C26.2 L3.1
NetC1_2: C1.2 R2.1 | length 1.7
  Top Layer w0.2: C1.2 R2.1
NetC4_1: C4.1 IC1.1 | length 2.1
  Top Layer w0.5: IC1.1 21.137,-22.405 21.187,-22.455 C4.1
NetC4_2: C4.2 D2.K IC1.8 L2.1 | length 3
  Top Layer w0.5: L2.1 19.613,-25.562 C4.2
NetC20_2: C20.2 IC5.47 R11.2 | length 3.4
  Top Layer w0.2: IC5.47 9.63,-46.169 9.905,-46.444
  Top Layer w0.3: 9.905,-46.444 10.105,-46.644 10.105,-47.294 9.955,-47.444 R11.2@10.955,-47.444
NetC21_1: C21.1 IC5.48 | length 3.2
  Top Layer w0.2: IC5.48 9.98,-45.519 10.355,-45.894 10.705,-45.894
  Top Layer w0.3: 10.705,-45.894 11.955,-47.144 C21.1@11.955,-47.444
NetC23_2: C23.2 IC5.2 L3.2 | length 8
  Top Layer w0.2: IC5.2 11.402,-44.769
  Top Layer w0.355: 11.402,-44.769 14.377,-44.769 15.75,-46.142 L3.2
NetC24_2: C24.2 IC5.44 XTAL1.3 | length 6.8
  Top Layer w0.15: IC5.44 8.58,-46.358 8.2,-46.738 8.2,-49.972 C24.2 9.022,-50.794 XTAL1.3
NetC25_2: C25.2 IC5.45 XTAL1.1 | length 14.8
  Top Layer w0.15: IC5.45@8.93,-45.225 8.93,-46.432 8.5,-46.862 8.5,-49.217 9.077,-49.794 13.732,-49.794 14.122,-50.185 14.122,-50.894 C25.2 12.422,-51.494 11.805,-52.111 11.805,-52.611 XTAL1.1
NetCN1_1: CN1.1 L1.2 | length 5.2
  Top Layer w1.5: L1.2 5.425,-14.375 5.425,-11.093 6.118,-10.4 CN1.1
NetCN1_2: CN1.2 CN1.3 L1.1 | length 13.4
  Top Layer w1.5: L1.1 2.3,-14.2 2.5,-14 2.5,-7.5 CN1.2 5.2,-4.2 CN1.3
NetCN2_1: CN2.1 R1.2 R2.2 | length 6
  Top Layer w0.2: R2.2 R1.2 15.087,-2 CN2.1
NetIC1_4: IC1.4 R5.1 R7.2 | length 2.7
  Top Layer w0.15: IC1.4 21.18,-18.595 21.2,-18.575 R7.2 R5.1
NetIC3_3: IC3.3 R9.1 | length 3.2
  Top Layer w0.15: R9.1 18.45,-42.763 IC3.3
NetIC3_6: IC3.6 R10.1 | length 3.2
  Top Layer w0.15: R10.1 20.4,-42.813 IC3.6
NetIC5_41: IC5.41 R13.1 | length 14
  Top Layer w0.15: v1(6,-46.9) 6.086,-46.814 6.469,-46.814 6.775,-46.508 6.775,-46.483 7.083,-46.175 7.108,-46.175 7.52,-45.763 7.52,-45.279 IC5.41 ; v1(8.7,-56.2) 8.9,-56 R13.1
  Bottom Layer w0.15: v1(6,-46.9) 6.1,-46.9 7.6,-48.4 7.6,-53.8 7.816,-54.016 7.819,-54.016 8.127,-54.323 8.127,-54.327 8.441,-54.641 8.444,-54.641 8.7,-54.897 8.7,-54.915 8.752,-54.967 8.752,-56.148 v1(8.7,-56.2)
NetR6_2: R6.2 R7.1 | length 0.9
  Top Layer w0.15: R6.2 R7.1
R\E\S\E\T\: CN7.10 IC4.2 IC5.9 R8.2 | length 42.2
  Top Layer w0.15: CN7.10 4.2,-59.935 v1(4.2,-59.2) ; IC5.9 v1(11.981,-42.319) 12.35,-41.95 12.35,-41.35 IC4.2 12.4,-41.25 13.025,-41.875 R8.2
  Bottom Layer w0.15: v1(4.2,-59.2) 4.2,-57.041 1.811,-54.651 1.811,-48.141 2.305,-47.647 2.305,-41.219 3.025,-40.499 3.3,-40.224 3.3,-40.149 3.3,-39.658 4.72,-38.238 4.72,-38.226 6.958,-35.988 7.808,-35.988 7.819,-35.998 8.669,-35.998 11.047,-38.377 11.047,-41.386 v1(11.981,-42.319)
SD_CLK: IC5.31 IC6.6 | length 23.2
  Top Layer w0.15: 1.405,-45.509 1.405,-45.905 ; 1.5,-43.851 1.405,-43.946 ; IC6.6 2.667,-56.667 3.258,-57.258 4.342,-57.258 4.682,-56.918 4.682,-54.823 4.7,-54.805 4.7,-53.154 3.4,-51.854 3.4,-47.9 1.405,-45.905 ; IC5.31 2.682,-42.669 1.405,-43.946 ; 1.405,-45.905 1.405,-43.946
SD_CMD/C\S\: IC5.30 IC6.1 R12.1 | length 14.3
  Top Layer w0.15: v1@3.422,-41.994 v1(3.526,-42.098) 3.722,-42.294 5.641,-42.294 5.666,-42.319 IC5.30 ; v1(3.6,-44.1) 2.9,-44.1 2.4,-44.6 2.4,-44.607 2.305,-44.702 2.305,-45.405 5.207,-48.307 IC6.1 5.207,-49.807 5.7,-50.3 R12.1
  Bottom Layer w0.15: v1(3.526,-42.098) 3.563,-42.135 3.563,-44.063 v1(3.6,-44.1)
SD_D0/SDO: IC5.32 IC6.2 | length 10.6
  Top Layer w0.15: IC6.2 3.937,-48.012 3.7,-47.776 1.705,-45.781 1.705,-45.385 1.705,-44.453 1.705,-44.071 1.8,-43.976 1.976,-43.8 2.757,-43.019 4.136,-43.019 IC5.32
SD_D1/SDI: IC5.33 IC6.5 | length 20.3
  Top Layer w0.15: IC6.5 1.397,-55.08 2.788,-53.689 2.87,-53.689 v1(2.936,-53.623) ; v1(5.298,-53.492) 5.298,-51.182 4.557,-50.441 4.557,-48.657 4.557,-48.118 4.154,-47.716 2.005,-45.567 2.005,-45.261 2.005,-44.577 2.005,-44.195 2.831,-43.369 4.062,-43.369 IC5.33
  Bottom Layer w0.15: v1(2.936,-53.623) 3.067,-53.492 v1(5.298,-53.492)
SD_D2/SHD: IC5.28 IC6.7 | length 20.7
  Top Layer w0.15: IC6.7 3.937,-53.437 0.7,-50.2 0.7,-42.472 1.961,-41.212 3.987,-41.212 4.176,-41.4 4.876,-41.4 5.045,-41.569 5.122,-41.569 5.172,-41.619 IC5.28
SD_D3/SWP: IC5.29 IC6.3 | length 12.4
  Top Layer w0.15: IC6.3 2.667,-47.667 1.105,-46.105 1.105,-42.934 2.528,-41.512 3.863,-41.512 4.051,-41.7 4.751,-41.7 4.921,-41.869 4.94,-41.869 4.99,-41.919 5.52,-41.919 5.545,-41.944 5.655,-41.944 5.655,-41.969 IC5.29
TCK: CN7.4 IC5.20 | length 31.4
  Top Layer w0.15: v1(7.922,-37.994) 7.922,-38.77 8.247,-39.095 8.247,-39.836 8.23,-39.853 IC5.20
  Bottom Layer w0.15: v1(6.88,-62.335) 6.135,-61.59 6.135,-60.848 5.827,-60.54 5.025,-59.738 5.025,-57.017 2.411,-54.403 2.411,-48.789 3.69,-47.51 3.69,-44.752 4.2,-44.242 4.2,-42.342 6.841,-39.701 6.841,-38.425 7.271,-37.994 v1(7.922,-37.994)
TDI: CN7.8 IC5.18 | length 35
  Top Layer w0.15: IC5.18 8.93,-39.794 9.036,-39.688 9.036,-39.48 v1(9.122,-39.394)
  Bottom Layer w0.15: v1(5.61,-61.065) 4.725,-60.18 4.725,-57.141 2.111,-54.527 2.111,-50.236 2.111,-48.665 3.355,-47.421 3.355,-44.702 3.001,-44.348 3.001,-41.881 5.491,-39.39 5.491,-37.879 7.083,-36.288 7.684,-36.288 7.694,-36.298 8.493,-36.298 9.747,-37.552 9.747,-38.769 v1(9.122,-39.394)
TDO: CN7.6 IC5.21 | length 31.1
  Top Layer w0.15: v1(7.366,-38.642) 7.366,-38.666 7.88,-39.18 7.88,-39.209 7.947,-39.277 7.947,-39.712 7.88,-39.779 IC5.21 ; CN7.6 8.365,-61.065 9,-61.7 10.1,-61.7 10.5,-61.3 v1(10.5,-55)
  Bottom Layer w0.15: v1(7.366,-38.642) 8.297,-39.573 8.297,-39.794 10.6,-42.097 10.6,-43.9 8.5,-46 8.5,-46.751 8.9,-47.151 8.9,-49.951 9.649,-50.7 9.849,-50.7 10.2,-51.051 10.2,-53.649 10.1,-53.749 10.1,-54.8 10.5,-55.2 v1(10.5,-55)
TMS: CN7.2 IC5.17 | length 42.2
  Top Layer w0.15: CN7.2 5.305,-63.3 v1(5.4,-63.3) ; IC5.17 9.305,-40.394 9.305,-39.985 9.495,-39.794 10.118,-39.172 10.928,-39.172 11.3,-38.8 v1(11.3,-37.8)
  Bottom Layer w0.15: v1(5.4,-63.3) 3.316,-61.216 3.316,-57.695 1.511,-55.889 1.511,-48.017 1.9,-47.627 1.922,-47.606 1.922,-47.171 1.9,-47.149 1.9,-41.2 2.725,-40.375 3,-40.1 3,-39.533 4.42,-38.114 4.42,-38.102 6.834,-35.688 7.95,-35.688 7.96,-35.698 9.198,-35.698 v1@11.336,-37.836
U0RX: CN7.7 IC5.40 | length 18.5
  Top Layer w0.15: v1(5.1,-46.5) 5.549,-46.051 6.782,-46.051 6.958,-45.875 6.984,-45.875 7.17,-45.688 7.17,-45.279 IC5.40
  Bottom Layer w0.15: v1(5.1,-46.5) 5.1,-47.432 5.7,-48.032 5.7,-52.2 6.1,-52.6 6.1,-53.8 5.7,-54.2 5.7,-55.7 5.9,-55.9 5.9,-60.085 6.309,-60.494 v1(6.88,-61.065)
U0TX: CN7.9 R13.2 | length 7.7
  Top Layer w0.15: CN7.9 5.2,-60.205 5.2,-58.9 6.5,-57.6 9,-57.6 R13.2
VIN: C2.2 C3.2 CN4.1 IC1.7 L1.3 | length 15.4
  Top Layer w0.5: C3.2 12.91,-21.135 IC1.7
  Top Layer w1: L1.3@5.3,-20.563 C2.2@8.937,-20.563 ; L1.3 5.3,-20.875 6.241,-21.816 6.241,-22.254 8,-24.013 CN4.1 ; C2.2 C2.2@8.937,-20.563 ; C3.2 12.3,-20.725 9.1,-20.725 C2.2@8.937,-20.563
pads on no net: AE1.2 CN7.X IC1.2 IC1.3 IC1.5 IC2.4 IC3.8 IC3.11 IC5.5 IC5.6 IC5.7 IC5.8 IC5.11 IC5.12 IC5.13 IC5.14 IC5.15 IC5.16 IC5.22 IC5.24 IC5.34 IC5.35 IC5.38 MT1.0 MT2.0
copper on no net:
  other v2: 5.1,-73.7 3.191,-72.909 7.009,-72.909 2.4,-71 7.8,-71 3.191,-69.091 7.009,-69.091 5.1,-68.3 16.5,-14.2 14.591,-13.409 18.409,-13.409 13.8,-11.5 19.2,-11.5 14.591,-9.591 18.409,-9.591 16.5,-8.8

## Polygon pours and split planes (outlines as drawn)
no net on Top Layer "NONET_L01_P029" (solid, remove dead copper, pour order 29): 13.88,-57.582 13.88,-55.9 14.594,-55.186 14.923,-55.186 15.63,-55.893 15.63,-57.582
NetC4_2 on Top Layer "NETC4_2_L01_P023" (solid, remove dead copper, pour order 23): 13.112,-22.65 13.358,-22.405 16.57,-22.405 16.57,-23.17 18.388,-24.988 18.388,-26.2 16.338,-26.2 15.062,-26.2 13.112,-24.25
GND on GND "GND_L02_P014" (solid, remove dead copper, pour order 14): -14.75,-76.5 49.7,-76.5 49.7,8.35 -14.75,8.35
GND on PWR "GND_L03_P027" (solid, remove dead copper, pour order 27): 0,-76.5 0,-4.6 44.2,-4.6 44.2,-76.5

## Keep-outs
Keep-Out Layer:
  lines w0.1: 3.8,-2.3 5.9,-2.3 ; 5.9,-2.3 2.3,-2.3 2.3,-0.7 5.8,-0.7 5.9,-0.7 5.9,-2.3

## Other copper
Top Layer:
  rectangle: 13.88,-64.044 15.63,-60.644
  text "1" at 2.646,-1.977 h1.5
GND:
  pour cut-out: 12.759,-55.341 18.931,-55.341 21.434,-57.844 21.434,-68.694 10.434,-68.694 10.434,-57.666
  text "2" at 3.354,-1.977 h1.5
PWR:
  pour cut-out: 12.756,-55.344 21.434,-55.344 21.434,-71 10.434,-71 10.434,-57.666
  text "3" at 4.151,-1.977 h1.5
Bottom Layer:
  text "4" at 5.004,-1.977 h1.5

## Silkscreen, mask and mechanical layers (free items; w line width, h text height)
Top Overlay:
  text "GND" at 1.522,-27.577 h1.5
  text "+12/+24V" at 5.533,-27.577 h1.5
  text "rev..Rev" at 18.621,-64.036 h2
Bottom Overlay:
  circle w0.2: c6.5,-7.2 r0.141
  lines w0.2: 3.9,-7.2 4.7,-7.2 ; 4.3,-7.6 4.3,-6.7 ; 5.2,-7.2 6.5,-7.2 ; 6.5,-8.1 ccw(c6.5,-7.2) 6.5,-6.3 ; 7.5,-7.2 8.9,-7.2 ; 9.5,-7.2 10.2,-7.2
  text "6-24VDC" at 10.82,-3.083 h2
  text "AUDIO" at 20.577,-4.877 h1.5
  text "GND" at 22.577,-4.877 h1.5
  text "DATA0" at 19.783,-44.977 h1.5
  text "DATA1" at 19.783,-47.577 h1.5
  text "GPIO23" at 19.792,-50.077 h1.5
  text "GPIO22" at 19.792,-52.577 h1.5
  text "GPIO21" at 19.792,-55.177 h1.5
  text "GND" at 19.678,-57.677 h1.5
  text "GND" at 19.783,-60.077 h1.5
Mechanical 1:
  the board outline again, w0.2